# Allegro board FSCV_V1.brd
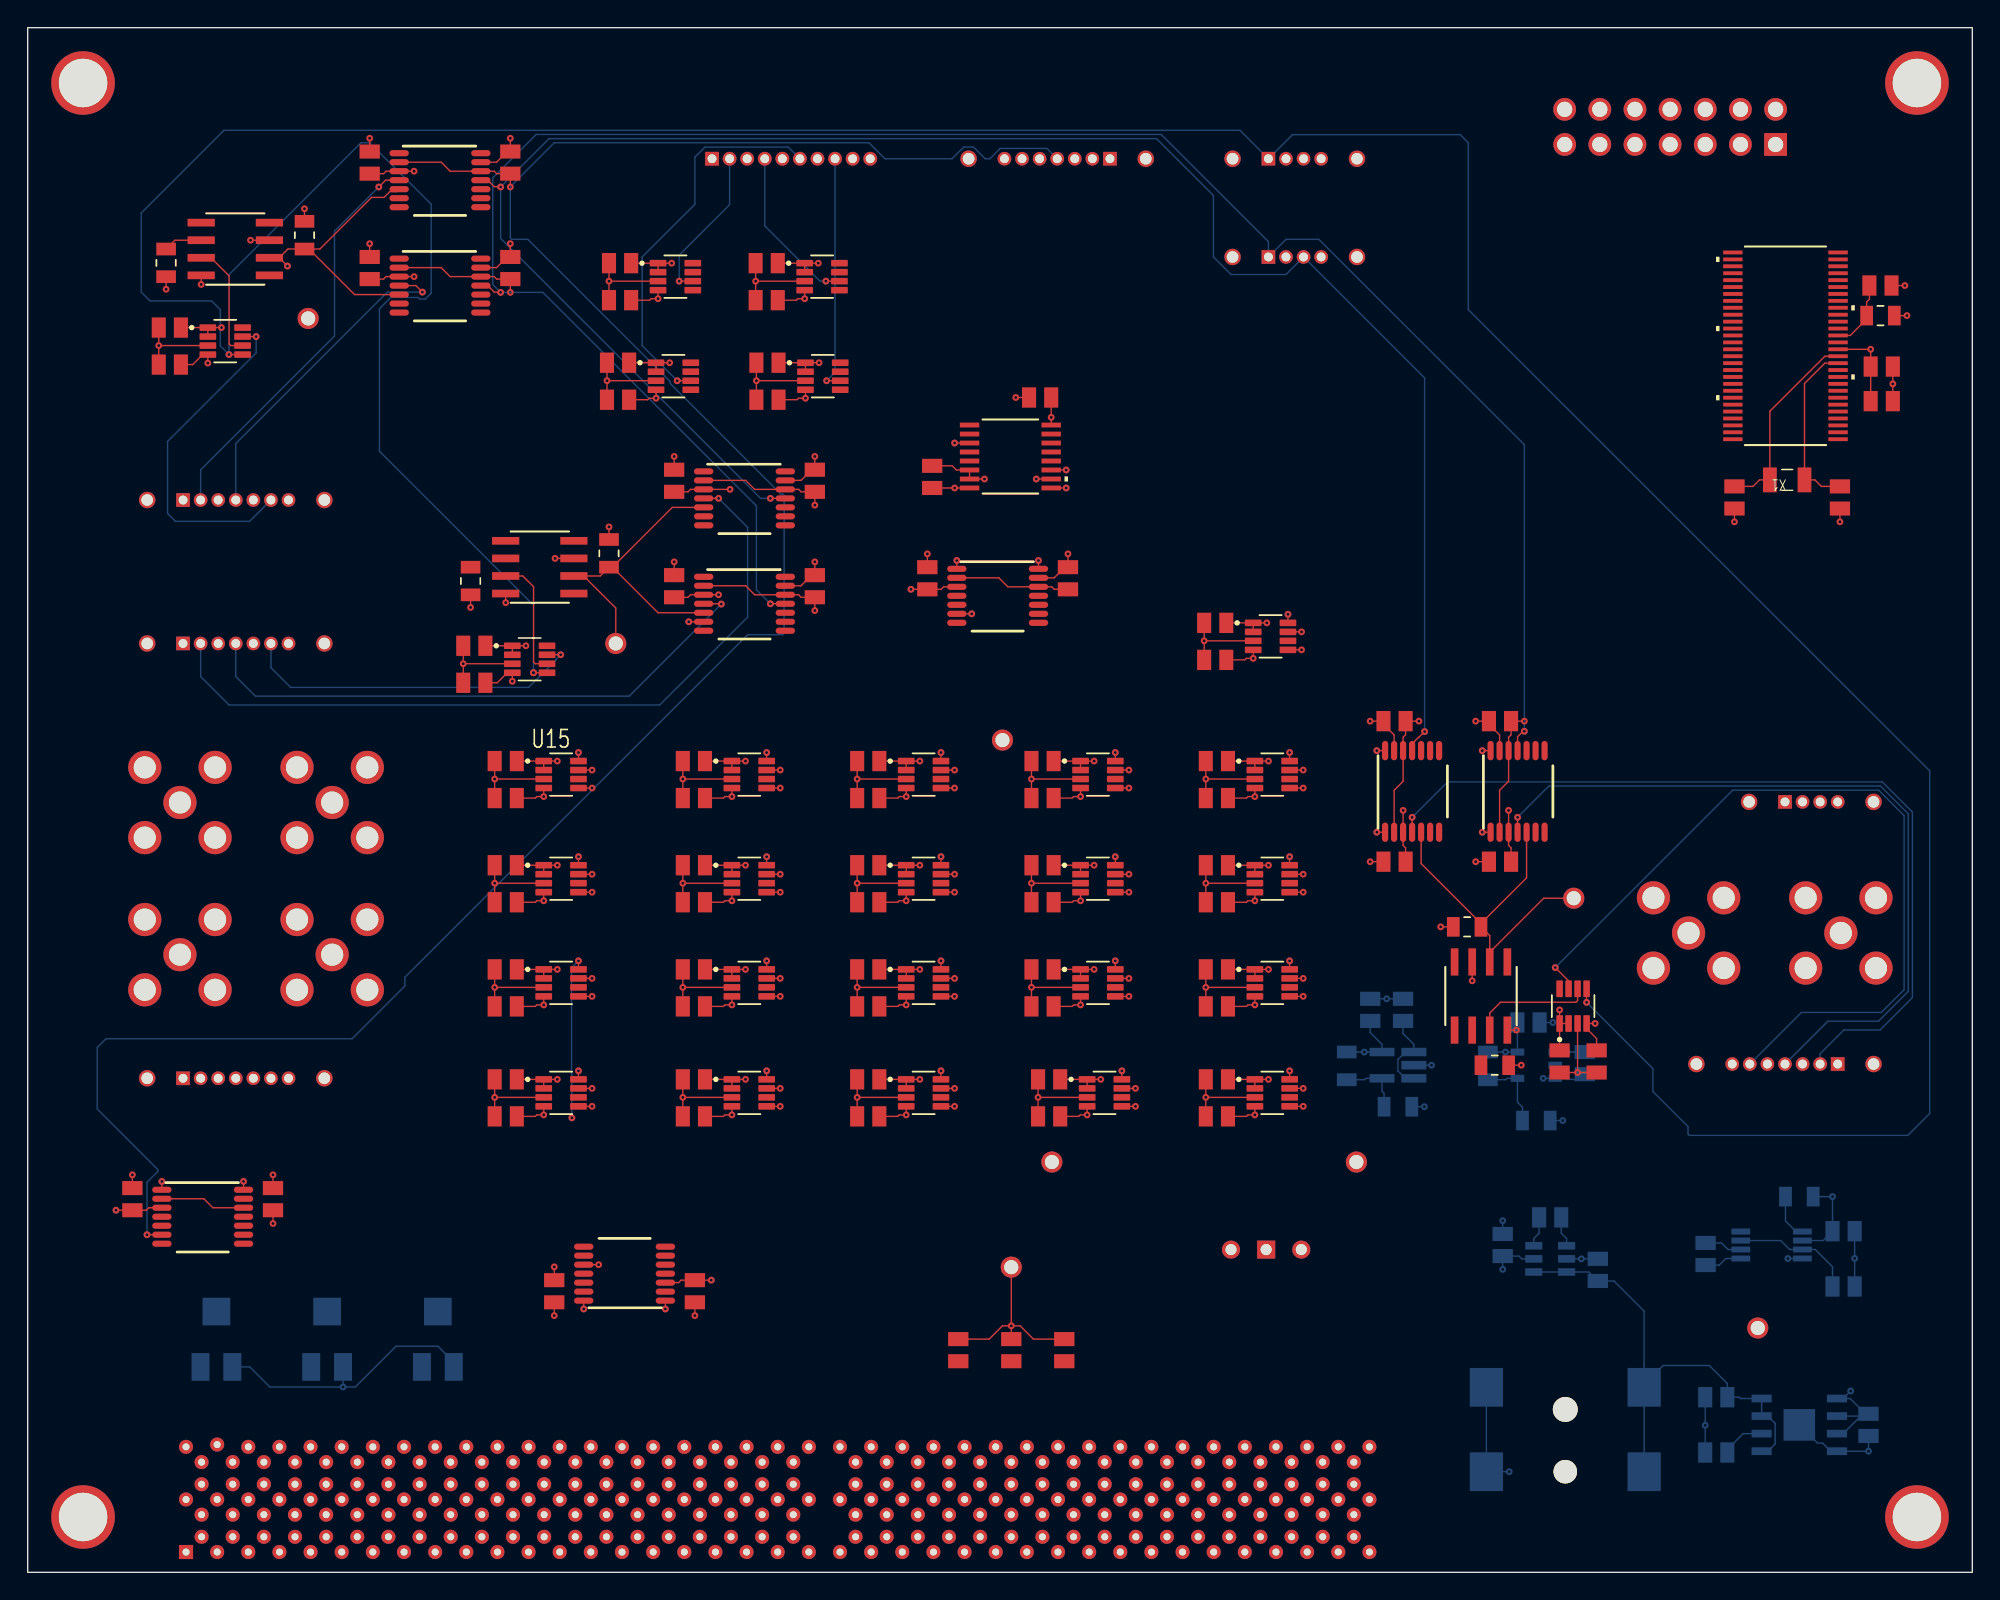
[diagram p0: board, top side]
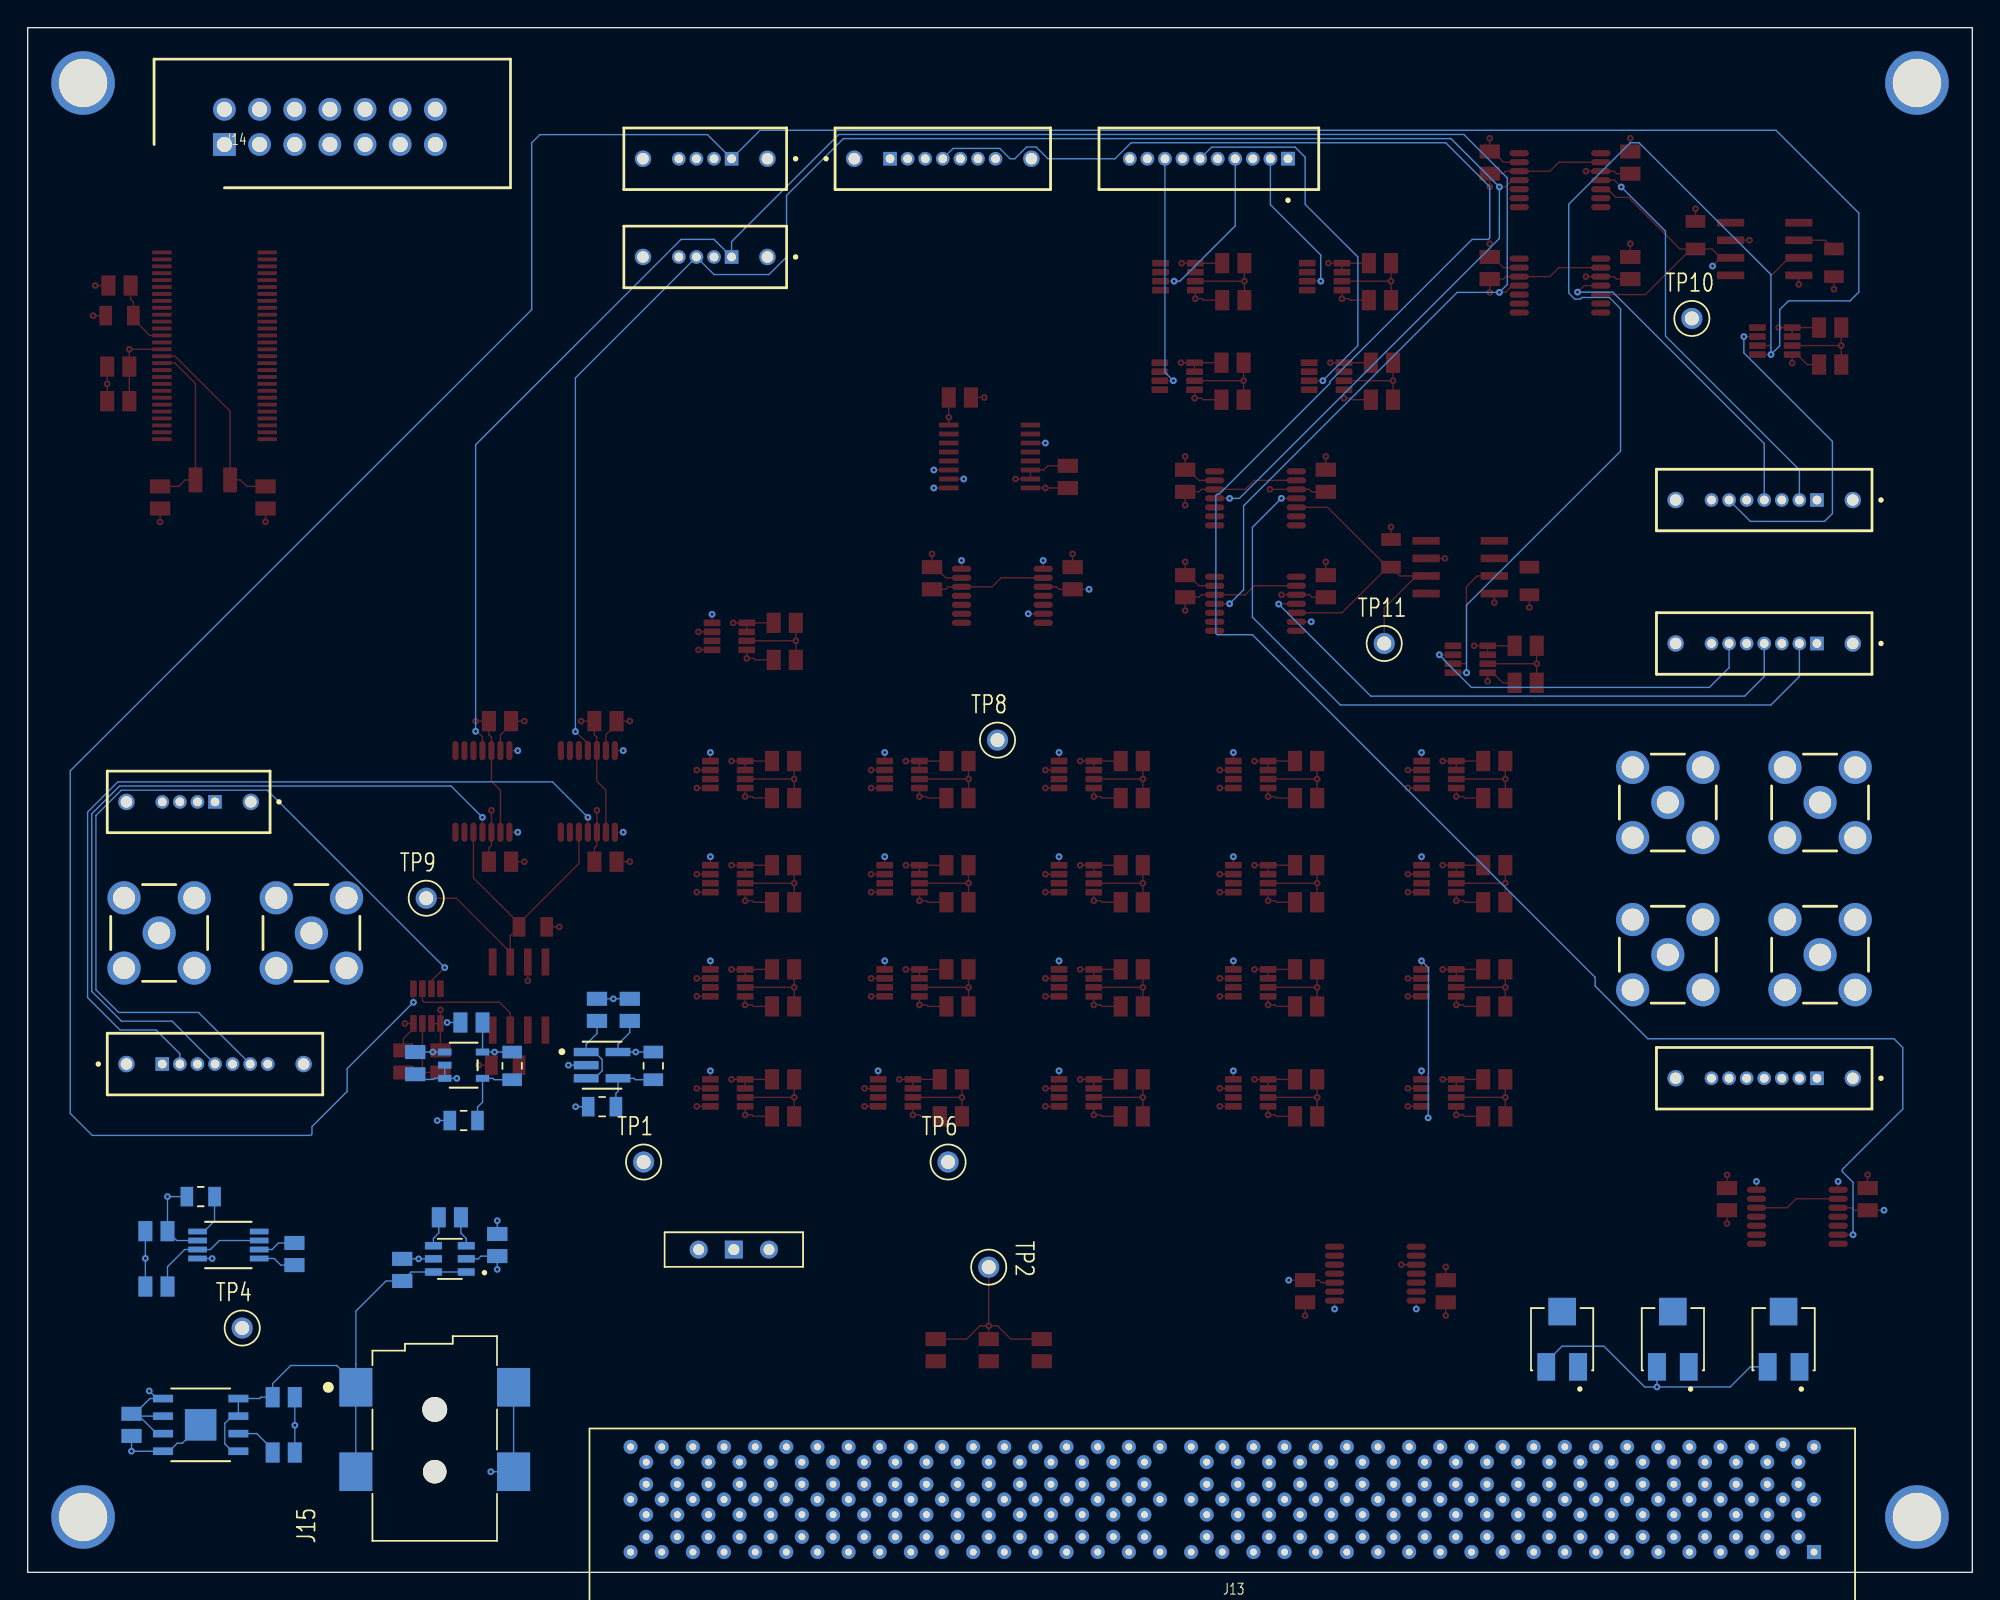
[diagram p1: board, bottom side, seen from below]

Outline 140.5 x 111.66 mm; copper layers: TOP, GND, TRACE, BOTTOM. Coordinates in mm from the lower left corner of the outline.
Outline path: rectangle 0,0 140.5,111.66

## Design rules (mm)
constraint set DEFAULT: min track width 0.127
net group ANALOG: nets SNFET_2_VD SNFET_4_VD SNFET_SHARED_VS TEST_EN_D
net group CONTROL: nets CH_EN_1_SEL CH_EN_2_SEL CH_EN_5_SEL CH_EN_D_SEL COND_EN_1_SEL COND_EN_2_SEL COND_EN_5_SEL COND_EN_D_SEL HP_BYPASS_EN_1_SEL HP_BYPASS_EN_2_SEL HP_BYPASS_EN_5_SEL HP_BYPASS_EN_D_SEL IREF_EN_12_SEL IREF_EN_56_SEL IREF_EN_D_SEL IREF_TEST_12_SEL IREF_TEST_56_SEL IREF_TEST_D_SEL SEL1_0 SEL1_1 SEL1_2 SEL4_0 SEL4_1 SEL5_0 SEL5_1 SEL6_0 SEL6_1 SEL7_0 SEL7_1 SEL8_0 SEL8_1 SEL9_0 SEL9_1 SEL10 SEL11 SEL12 SEL13 SEL14 SEL15 SEL16_0 SEL16_1
net group DIGITAL: nets CH_EN_1 CH_EN_2 CH_EN_5 CH_EN_D COND_EN_1 COND_EN_2 COND_EN_5 COND_EN_D HP_BYPASS_EN_1 HP_BYPASS_EN_2 HP_BYPASS_EN_5 HP_BYPASS_EN_D IREF_EN_12 IREF_EN_56 IREF_EN_D IREF_TEST_12 IREF_TEST_56 IREF_TEST_D VDD_12 VDD_56 VDD_D
net group MCU: nets RST TCK TDI TDO TEST TMS XIN XOUT
net group MISC: nets N162422
net group POWER: nets 3.3V +1.65V +5V -1.65V -5V
nets with their own width: min track width 0.1; nets 5V_UNREGULATED CM_EXT

## Placement (name value [footprint] x y rotation side)
C4  1.1n  [CAP0805]  133.87 93.02 180 top
C7  12p  [CAP0805]  130.94 77.7 270 top
C8  12p  [CAP0805]  123.31 77.7 270 top
C15  0.1u  [CAP0805]  73.32 58.65 180 top
C16  0.1u  [CAP0805]  73.32 55.97 0 top
C17  0.1u  [CAP0805]  73.32 51.12 180 top
C18  0.1u  [CAP0805]  73.32 48.44 0 top
C19  0.1u  [CAP0805]  73.32 43.59 180 top
C20  0.1u  [CAP0805]  73.32 40.91 0 top
C21  2.2u  [CAP0805]  122 12.66 180 bottom
C22  2.2u  [CAP0805]  133 10.66 270 bottom
C23  2.2u  [CAP0805]  122 8.66 180 bottom
C24  10u  [CAP0805]  131.2 20.66 0 bottom
C25  10u  [CAP0805]  131.2 24.66 0 bottom
C26  1u  [CAP0805]  121.23 23.01 270 bottom
C27  10u  [CAP0805]  113.44 21.86 90 bottom
C28  10u  [CAP0805]  106.57 23.66 90 bottom
C29  1u  [CAP0805]  110 25.66 0 bottom
C30  0.1u  [CAP0805]  60.73 58.65 180 top
C31  0.1u  [CAP0805]  60.73 55.97 0 top
C32  0.1u  [CAP0805]  60.73 51.12 180 top
C33  0.1u  [CAP0805]  60.73 48.44 0 top
C34  0.1u  [CAP0805]  60.73 43.59 180 top
C35  0.1u  [CAP0805]  60.73 40.91 0 top
C36  0.1u  [CAP0805]  60.73 35.63 180 top
C37  0.1u  [CAP0805]  60.73 32.96 0 top
C38  0.1u  [CAP0805]  48.13 58.65 180 top
C39  0.1u  [CAP0805]  48.13 55.97 0 top
C40  0.1u  [CAP0805]  48.13 51.12 180 top
C41  0.1u  [CAP0805]  48.13 48.44 0 top
C42  0.1u  [CAP0805]  48.13 43.59 180 top
C43  0.1u  [CAP0805]  48.13 40.91 0 top
C44  0.1u  [CAP0805]  48.13 35.63 180 top
C45  0.1u  [CAP0805]  48.13 32.96 0 top
C46  0.1u  [CAP0805]  34.54 58.65 180 top
C47  0.1u  [CAP0805]  34.54 55.97 0 top
C48  0.1u  [CAP0805]  34.54 51.12 180 top
C49  0.1u  [CAP0805]  34.54 48.44 0 top
C50  0.1u  [CAP0805]  34.54 43.59 180 top
C51  0.1u  [CAP0805]  34.54 40.91 0 top
C52  0.1u  [CAP0805]  34.54 35.63 180 top
C53  0.1u  [CAP0805]  34.54 32.96 0 top
C54  0.1u  [CAP0805]  85.92 58.65 180 top
C55  0.1u  [CAP0805]  85.92 55.97 0 top
C56  0.1u  [CAP0805]  85.92 51.12 180 top
C57  0.1u  [CAP0805]  85.92 48.44 0 top
C58  0.1u  [CAP0805]  85.92 43.59 180 top
C59  0.1u  [CAP0805]  85.92 40.91 0 top
C60  0.1u  [CAP0805]  73.8 35.63 180 top
C61  0.1u  [CAP0805]  73.8 32.96 0 top
C62  0.1u  [CAP0805]  85.92 35.63 180 top
C63  0.1u  [CAP0805]  85.92 32.96 0 top
C64  0.1u  [CAP0805]  85.8 68.63 180 top
C65  0.1u  [CAP0805]  85.8 65.96 0 top
C66  0.1u  [CAP0805]  110.68 36.93 270 top
C67  0.1u  [CAP0805]  113.36 36.93 90 top
C68  0.1u  [CAP0805]  98.75 51.37 180 top
C69  0.1u  [CAP0805]  98.75 61.53 0 top
C70  0.1u  [CAP0805]  106.38 61.53 0 top
C71  0.1u  [CAP0805]  106.38 51.37 180 top
C72  0.1u  [CAP0805]  34.87 101.91 270 top
C73  0.1u  [CAP0805]  24.71 101.91 90 top
C74  0.1u  [CAP0805]  34.87 94.28 270 top
C75  0.1u  [CAP0805]  10.27 89.98 180 top
C76  0.1u  [CAP0805]  10.27 87.31 0 top
C77  0.1u  [CAP0805]  24.71 94.28 90 top
C78  0.1u  [CAP0805]  56.87 78.91 270 top
C79  0.1u  [CAP0805]  46.71 78.91 90 top
C80  0.1u  [CAP0805]  56.87 71.28 270 top
C81  0.1u  [CAP0805]  32.27 66.98 180 top
C82  0.1u  [CAP0805]  32.27 64.31 0 top
C83  0.1u  [CAP0805]  46.71 71.28 90 top
C84  0.1u  [CAP0805]  17.72 26.97 270 top
C85  0.1u  [CAP0805]  7.56 26.97 90 top
C86  0.1u  [CAP0805]  75.16 71.86 270 top
C87  0.1u  [CAP0805]  65 71.86 90 top
C88  0.1u  [CAP0805]  73.15 84.92 0 top
C89  0.1u  [CAP0805]  65.35 79.19 270 top
C90  0.1u  [CAP0805]  42.8 94.63 180 top
C91  0.1u  [CAP0805]  42.8 91.96 0 top
C92  0.1u  [CAP0805]  53.4 94.63 180 top
C93  0.1u  [CAP0805]  53.4 91.96 0 top
C94  0.1u  [CAP0805]  42.66 87.44 180 top
C95  0.1u  [CAP0805]  42.66 84.76 0 top
C96  0.1u  [CAP0805]  53.45 87.44 180 top
C97  0.1u  [CAP0805]  53.45 84.76 0 top
C98  10u  [CAP0805]  99.37 40.66 90 bottom
C99  10u  [CAP0805]  97 40.66 90 bottom
C100  0.1u  [CAP0805]  38.04 20.32 90 top
C101  0.1u  [CAP0805]  48.21 20.32 270 top
C104  10u  [CAP0805]  133.96 87.16 0 top
C105  100n  [CAP0805]  133.96 84.66 0 top
C108  1u  [CAP0805]  108.43 39.75 0 bottom
C109  1u  [CAP0805]  112.5 36.81 90 bottom
J1  Connec-4  [SAMTEC_TFM-104-01-L-S-WT]  128.87 55.69 180 bottom
J5  Connec-7  [SAMTEC_TFM-107-01-S-S-WT]  126.96 36.74 0 bottom
J6  Connec-7  [SAMTEC_TFM-107-01-S-S-WT]  15.03 77.52 180 bottom
J7  Connec-7  [SAMTEC_TFM-107-01-S-S-WT]  15.03 67.15 180 bottom
J8  Connec-4  [SAMTEC_TFM-104-01-L-S-WT]  91.55 95.09 180 bottom
J9  Connec-4  [SAMTEC_TFM-104-01-L-S-WT]  91.55 102.19 180 bottom
J10  Connec-7  [SAMTEC_TFM-107-01-S-S-WT]  74.38 102.19 0 bottom
J11  Connec-10  [SAMTEC_TFM-110-01-X-S]  55.16 102.19 180 bottom
J12  Connec-7  [SAMTEC_TFM-107-01-S-S-WT]  15.03 35.72 180 bottom
J13  76291-0226  [762910226]  11.44 1.47 180 bottom
J14  JTAG  [SHDR14W64P254_2X7_2540X905X920P]  126.29 103.22 180 bottom
J15  PJ-002AH-SMT-TR  [CUI_PJ-002AH-SMT-TR]  110.79 10.38 90 bottom
J16  SMA-J-P-X-ST-TH1  [SAMTEC_SMA-J-P-X-ST-TH1]  131 46.22 180 bottom
J17  SMA-J-P-X-ST-TH1  [SAMTEC_SMA-J-P-X-ST-TH1]  11 55.65 180 bottom
J18  SMA-J-P-X-ST-TH1  [SAMTEC_SMA-J-P-X-ST-TH1]  120 46.22 180 bottom
J19  SMA-J-P-X-ST-TH1  [SAMTEC_SMA-J-P-X-ST-TH1]  22 55.65 180 bottom
J20  SMA-J-P-X-ST-TH1  [SAMTEC_SMA-J-P-X-ST-TH1]  11 44.65 180 bottom
J21  SMA-J-P-X-ST-TH1  [SAMTEC_SMA-J-P-X-ST-TH1]  22 44.65 180 bottom
NOREF  -  [unnamed]  136.5 107.66 0 top
NOREF#2  -  [unnamed]  136.5 4 0 top
NOREF#3  -  [unnamed]  4 107.66 0 top
NOREF#4  -  [unnamed]  4 4 0 top
R4  100k  [CAP0805]  74.89 16.06 90 top
R5  100k  [CAP0805]  67.24 16.06 90 top
R6  100k  [CAP0805]  71.06 16.06 90 top
R7  47k  [RES0805]  133.87 90.84 180 top
R9  100k  [RES0805]  128 27.16 0 bottom
R10  100k  [RES0805]  106 36.66 180 top
R11  100k  [RES0805]  104 46.66 0 top
R12  100k  [RES0805]  20 96.66 270 top
R13  100k  [RES0805]  10 94.66 90 top
R14  100k  [RES0805]  42 73.66 270 top
R15  100k  [RES0805]  32 71.66 90 top
R16  180k  [RES0805]  95.3 36.61 90 bottom
R17  480k  [RES0805]  99 33.66 180 bottom
R18  100k  [RES0805]  105.5 36.61 90 bottom
R19  32k  [RES0805]  109 32.66 180 bottom
SW1  MSS-102559-14A-D  [SW_MSS-102559-14A-D]  89.48 23.33 180 bottom
TP1  5000  [KEYSTONE_5000]  96 29.66 180 bottom
TP2  5000  [KEYSTONE_5000]  71.06 22.06 270 bottom
TP4  5000  [KEYSTONE_5000]  125 17.66 180 bottom
TP6  5000  [KEYSTONE_5000]  74 29.66 180 bottom
TP8  5000  [KEYSTONE_5000]  70.43 60.16 180 bottom
TP9  5000  [KEYSTONE_5000]  111.7 48.73 180 bottom
TP10  5000  [KEYSTONE_5000]  20.26 90.64 180 bottom
TP11  5000  [KEYSTONE_5000]  42.49 67.15 180 bottom
U2  TMUX6104PW  [PW0014A_N]  43.12 21.59 180 top
U3  ADP7118ARDZ-3.3  [RD-8-1_ADI]  128 10.66 180 bottom
U4  LTC1751  [MSOP-8_MS_LIT]  126 23.66 180 bottom
U5  LTC1983  [SOT95P280X100-6N]  110 22.66 0 bottom
U6  TPS784-Q1DBV  [DBV0005A_IPC_A]  99 36.66 180 bottom
U7  MAX1735  [21-0057F_MXM]  109 36.66 180 bottom
U8  TMUX4051-Q1_PWDYY  [TSSOP16_PW_TEX]  71 80.66 0 top
U9  TMUX6104PW  [PW0014A_N]  12.65 25.7 0 top
U10  TMUX6104PW  [PW0014A_N]  70.08 70.59 0 top
U11  TMUX6119DCNR  [SOT65P280X145-8N]  46.8 93.66 0 top
U12  TMUX6119DCNR  [SOT65P280X145-8N]  57.4 93.66 0 top
U13  TMUX6119DCNR  [SOT65P280X145-8N]  46.66 86.47 0 top
U14  TMUX6119DCNR  [SOT65P280X145-8N]  57.45 86.47 0 top
U15  TMUX6119DCNR  [SOT65P280X145-8N]  38.54 57.67 0 top
U16  TMUX6119DCNR  [SOT65P280X145-8N]  38.54 50.14 0 top
U17  TMUX6119DCNR  [SOT65P280X145-8N]  38.54 42.61 0 top
U18  TMUX6119DCNR  [SOT65P280X145-8N]  38.54 34.66 0 top
U19  TMUX6119DCNR  [SOT65P280X145-8N]  52.13 57.67 0 top
U20  TMUX6119DCNR  [SOT65P280X145-8N]  52.13 50.14 0 top
U21  TMUX6119DCNR  [SOT65P280X145-8N]  52.13 42.61 0 top
U22  TMUX6119DCNR  [SOT65P280X145-8N]  52.13 34.66 0 top
U23  TMUX6119DCNR  [SOT65P280X145-8N]  64.73 57.67 0 top
U24  TMUX6119DCNR  [SOT65P280X145-8N]  64.73 50.14 0 top
U25  TMUX6119DCNR  [SOT65P280X145-8N]  64.73 42.61 0 top
U26  TMUX6119DCNR  [SOT65P280X145-8N]  64.73 34.66 0 top
U27  TMUX6119DCNR  [SOT65P280X145-8N]  77.32 57.67 0 top
U28  TMUX6119DCNR  [SOT65P280X145-8N]  77.32 50.14 0 top
U29  TMUX6119DCNR  [SOT65P280X145-8N]  77.32 42.61 0 top
U30  TMUX6119DCNR  [SOT65P280X145-8N]  89.92 57.67 0 top
U31  TMUX6119DCNR  [SOT65P280X145-8N]  89.92 50.14 0 top
U32  TMUX6119DCNR  [SOT65P280X145-8N]  89.92 42.61 0 top
U33  TMUX6119DCNR  [SOT65P280X145-8N]  77.8 34.66 0 top
U34  TMUX6119DCNR  [SOT65P280X145-8N]  89.92 34.66 0 top
U35  TMUX6119DCNR  [SOT65P280X145-8N]  89.8 67.66 0 top
U36  ADA4610-1  [R_8_ADI]  105 41.66 90 top
U37  TMUX6119DCNR  [SOT65P280X145-8N]  111.65 40.93 90 top
U38  TMUX6104PW  [PW0014A_N]  100.02 56.45 90 top
U39  TMUX6104PW  [PW0014A_N]  107.64 56.45 90 top
U40  ADA4610-1  [R_8_ADI]  15 95.66 0 top
U41  TMUX6119DCNR  [SOT65P280X145-8N]  14.27 89 0 top
U42  TMUX6104PW  [PW0014A_N]  29.79 100.63 0 top
U43  TMUX6104PW  [PW0014A_N]  29.79 93.01 0 top
U44  ADA4610-1  [R_8_ADI]  37 72.66 0 top
U45  TMUX6119DCNR  [SOT65P280X145-8N]  36.27 66 0 top
U46  TMUX6104PW  [PW0014A_N]  51.79 77.63 0 top
U47  TMUX6104PW  [PW0014A_N]  51.79 70.01 0 top
U48  MSP430FR4132IG56  [DGG56_TEX]  127 88.66 180 top
VR3  3314J-1-754E  [TRIM_3314J-1-754E]  13.63 16.85 180 bottom
VR4  3314J-1-754E  [TRIM_3314J-1-754E]  21.63 16.85 180 bottom
VR5  3314J-1-754E  [TRIM_3314J-1-754E]  29.63 16.85 180 bottom
X1  Crystal  [FC135R327680KAA3]  127.12 78.97 180 top

## Library data of the parts
C4 C7 C8 C15-C101 C104 C105 C108 C109 = C
J1 J8 J9 = Connec-4
J5-J7 J10 J12 = Connec-7
J11 = Connec-10
J13 = Edge_conn_76291-0226
J14 = JTAG_87831-1420
J15 = Power_Jack_PJ-002AH-SMT-TR
J16-J21 = SMA-J-P-X-ST-TH1
R4-R7 R9-R19 = R
SW1 = Switch_1P2T_MSS-102559-14A-D
TP1 TP2 TP4 TP6 TP8-TP11 = TP
U2 U9 U10 U38 U39 U42 U43 U46 U47 = TMUX6104PWR
U3 = Volt_Reg_ADP7118ARDZ-3.3: User Part Number: PN
U4 = LTC1751EMS8-5
U5 = LTC1983ES6-5
U6 = TPS78401QDBVRQ1
U7 = MAX1735EUK25T
U8 = TMUX4051PWRQ1
U11-U35 U37 U41 U45 = TMUX6119DCNR
U36 U40 U44 = ADA4610-1ARJZ-R2
U48 = MSP430FR4132IG56
VR3-VR5 = 3314J-1-754E
X1 = Crystal

## Footprints (pads in the part's own frame, mm; a bottom-side part is the same pattern mirrored in y, then rotated)
21-0057F_MXM
  rect 0.978x0.508 smd: 1(-1.365,0.95) 2(-1.365,0) 3(-1.365,-0.95) 4(1.365,-0.95) 5(1.365,0.95)
762910226
  round 0 hole 2.08 unplated: (-87.2,1.9) (1.7,5.32)
  rect 1.02x1.02 hole 0.51: 1(0,0)
  round 1.02 hole 0.51: 2(-1.125,1.1) 3(-1.125,2.7) 4(-2.25,0) 5(-3.375,1.1) 6(-3.375,2.7) 7(-4.5,0) 8(-5.625,1.1) 9(-5.625,2.7) 10(-6.75,0) 11(-7.875,1.1) 12(-7.875,2.7) 13(-9,0) 14(-10.125,1.1) 15(-10.125,2.7) 16(-11.25,0) 17(-12.375,1.1) 18(-12.375,2.7) 19(-13.5,0) 20(-14.625,1.1) 21(-14.625,2.7) 22(-15.75,0) 23(-16.875,1.1) 24(-16.875,2.7) 25(-18,0) 26(-19.125,1.1) 27(-19.125,2.7) 28(-20.25,0) 29(-21.375,1.1) 30(-21.375,2.7) 31(-22.5,0) 32(-23.625,1.1) 33(-23.625,2.7) 34(-24.75,0) 35(-25.875,1.1) 36(-25.875,2.7) 37(-27,0) 38(-28.125,1.1) 39(-28.125,2.7) 40(-29.25,0) 41(-30.375,1.1) 42(-30.375,2.7) 43(-31.5,0) 44(-32.625,1.1) 45(-32.625,2.7) 46(-33.75,0) 47(-34.875,1.1) 48(-34.875,2.7) 49(-36,0) 50(-37.125,1.1) 51(-37.125,2.7) 52(-38.25,0) 53(-39.375,1.1) 54(-39.375,2.7) 55(-40.5,0) 56(-41.625,1.1) 57(-41.625,2.7) 58(-42.75,0) 59(-43.875,1.1) 60(-43.875,2.7) 61(-45,0) 62(-47.25,0) 63(-48.375,1.1) 64(-48.375,2.7) 65(-49.5,0) 66(-50.625,1.1) 67(-50.625,2.7) 68(-51.75,0) 69(-52.875,1.1) 70(-52.875,2.7) 71(-54,0) 72(-55.125,1.1) 73(-55.125,2.7) 74(-56.25,0) 75(-57.375,1.1) 76(-57.375,2.7) 77(-58.5,0) 78(-59.625,1.1) 79(-59.625,2.7) 80(-60.75,0) 81(-61.875,1.1) 82(-61.875,2.7) 83(-63,0) 84(-64.125,1.1) 85(-64.125,2.7) 86(-65.25,0) 87(-66.375,1.1) 88(-66.375,2.7) 89(-67.5,0) 90(-68.625,1.1) 91(-68.625,2.7) 92(-69.75,0) 93(-70.875,1.1) 94(-70.875,2.7) 95(-72,0) 96(-73.125,1.1) 97(-73.125,2.7) 98(-74.25,0) 99(-75.375,1.1) 100(-75.375,2.7) 101(-76.5,0) 102(-77.625,1.1) 103(-77.625,2.7) 104(-78.75,0) 105(-79.875,1.1) 106(-79.875,2.7) 107(-81,0) 108(-82.125,1.1) 109(-82.125,2.7) 110(-83.25,0) 111(-84.375,1.1) 112(-84.375,2.7) 113(-85.5,0) 114(-85.5,7.6) 115(-84.375,6.5) 116(-84.375,4.9) 117(-83.25,7.6) 118(-82.125,6.5) 119(-82.125,4.9) 120(-81,7.6) 121(-79.875,6.5) 122(-79.875,4.9) 123(-78.75,7.6) 124(-77.625,6.5) 125(-77.625,4.9) 126(-76.5,7.6) 127(-75.375,6.5) 128(-75.375,4.9) 129(-74.25,7.6) 130(-73.125,6.5) 131(-73.125,4.9) 132(-72,7.6) 133(-70.875,6.5) 134(-70.875,4.9) 135(-69.75,7.6) 136(-68.625,6.5) 137(-68.625,4.9) 138(-67.5,7.6) 139(-66.375,6.5) 140(-66.375,4.9) 141(-65.25,7.6) 142(-64.125,6.5) 143(-64.125,4.9) 144(-63,7.6) 145(-61.875,6.5) 146(-61.875,4.9) 147(-60.75,7.6) 148(-59.625,6.5) 149(-59.625,4.9) 150(-58.5,7.6) 151(-57.375,6.5) 152(-57.375,4.9) 153(-56.25,7.6) 154(-55.125,6.5) 155(-55.125,4.9) 156(-54,7.6) 157(-52.875,6.5) 158(-52.875,4.9) 159(-51.75,7.6) 160(-50.625,6.5) 161(-50.625,4.9) 162(-49.5,7.6) 163(-48.375,6.5) 164(-48.375,4.9) 165(-47.25,7.6) 166(-45,7.6) 167(-43.875,6.5) 168(-43.875,4.9) 169(-42.75,7.6) 170(-41.625,6.5) 171(-41.625,4.9) 172(-40.5,7.6) 173(-39.375,6.5) 174(-39.375,4.9) 175(-38.25,7.6) 176(-37.125,6.5) 177(-37.125,4.9) 178(-36,7.6) 179(-34.875,6.5) 180(-34.875,4.9) 181(-33.75,7.6) 182(-32.625,6.5) 183(-32.625,4.9) 184(-31.5,7.6) 185(-30.375,6.5) 186(-30.375,4.9) 187(-29.25,7.6) 188(-28.125,6.5) 189(-28.125,4.9) 190(-27,7.6) 191(-25.875,6.5) 192(-25.875,4.9) 193(-24.75,7.6) 194(-23.625,6.5) 195(-23.625,4.9) 196(-22.5,7.6) 197(-21.375,6.5) 198(-21.375,4.9) 199(-20.25,7.6) 200(-19.125,6.5) 201(-19.125,4.9) 202(-18,7.6) 203(-16.875,6.5) 204(-16.875,4.9) 205(-15.75,7.6) 206(-14.625,6.5) 207(-14.625,4.9) 208(-13.5,7.6) 209(-12.375,6.5) 210(-12.375,4.9) 211(-11.25,7.6) 212(-10.125,6.5) 213(-10.125,4.9) 214(-9,7.6) 215(-7.875,6.5) 216(-7.875,4.9) 217(-6.75,7.6) 218(-5.625,6.5) 219(-5.625,4.9) 220(-4.5,7.6) 221(-3.375,6.5) 222(-3.375,4.9) 223(-2.25,7.77) 224(-1.125,6.5) 225(-1.125,4.9) 226(0,7.6) A1(0,3.8) A2(-2.25,3.8) A3(-4.5,3.8) A4(-6.75,3.8) A5(-9,3.8) A6(-11.25,3.8) A7(-13.5,3.8) A8(-15.75,3.8) A9(-18,3.8) A10(-20.25,3.8) A11(-22.5,3.8) A12(-24.75,3.8) A13(-27,3.8) A14(-29.25,3.8) A15(-31.5,3.8) A16(-33.75,3.8) A17(-36,3.8) A18(-38.25,3.8) A19(-40.5,3.8) A20(-42.75,3.8) A21(-45,3.8) A22(-47.25,3.8) A23(-49.5,3.8) A24(-51.75,3.8) A25(-54,3.8) A26(-56.25,3.8) A27(-58.5,3.8) A28(-60.75,3.8) A29(-63,3.8) A30(-65.25,3.8) A31(-67.5,3.8) A32(-69.75,3.8) A33(-72,3.8) A34(-74.25,3.8) A35(-76.5,3.8) A36(-78.75,3.8) A37(-81,3.8) A38(-83.25,3.8) A39(-85.5,3.8)
CAP0805
  rect 1.02x1.47 smd: 1(-0.8,0) 2(0.8,0)
CUI_PJ-002AH-SMT-TR
  round 1.7 hole 1.7 unplated: (-3.1,0.3)
  round 1.8 hole 1.8 unplated: (1.4,0.3)
  rect 2.8x2.4 smd: 1A(3,6) 1B(-3.1,6) 2(-3.1,-5.4) 3(3,-5.4)
DBV0005A_IPC_A
  rect 1.805x0.612 smd: 1(-1.151,0.95) 2(-1.151,0) 3(-1.151,-0.95) 4(1.151,-0.95) 5(1.151,0.95)
DGG56_TEX
  rect 1.404x0.279 smd: 1(-3.801,6.75) 2(-3.801,6.25) 3(-3.801,5.75) 4(-3.801,5.25) 5(-3.801,4.75) 6(-3.801,4.25) 7(-3.801,3.75) 8(-3.801,3.25) 9(-3.801,2.75) 10(-3.801,2.25) 11(-3.801,1.75) 12(-3.801,1.25) 13(-3.801,0.75) 14(-3.801,0.25) 15(-3.801,-0.25) 16(-3.801,-0.75) 17(-3.801,-1.25) 18(-3.801,-1.75) 19(-3.801,-2.25) 20(-3.801,-2.75) 21(-3.801,-3.25) 22(-3.801,-3.75) 23(-3.801,-4.25) 24(-3.801,-4.75) 25(-3.801,-5.25) 26(-3.801,-5.75) 27(-3.801,-6.25) 28(-3.801,-6.75) 29(3.801,-6.75) 30(3.801,-6.25) 31(3.801,-5.75) 32(3.801,-5.25) 33(3.801,-4.75) 34(3.801,-4.25) 35(3.801,-3.75) 36(3.801,-3.25) 37(3.801,-2.75) 38(3.801,-2.25) 39(3.801,-1.75) 40(3.801,-1.25) 41(3.801,-0.75) 42(3.801,-0.25) 43(3.801,0.25) 44(3.801,0.75) 45(3.801,1.25) 46(3.801,1.75) 47(3.801,2.25) 48(3.801,2.75) 49(3.801,3.25) 50(3.801,3.75) 51(3.801,4.25) 52(3.801,4.75) 53(3.801,5.25) 54(3.801,5.75) 55(3.801,6.25) 56(3.801,6.75)
FC135R327680KAA3
  rect 1x1.8 smd: 1(-1.25,0) 2(1.25,0)
KEYSTONE_5000
  round 1.53 hole 1.02: TP(0,0)
MSOP-8_MS_LIT
  rect 1.353x0.431 smd: 1(-2.226,0.975) 2(-2.226,0.325) 3(-2.226,-0.325) 4(-2.226,-0.975) 5(2.226,-0.975) 6(2.226,-0.325) 7(2.226,0.325) 8(2.226,0.975)
PW0014A_N
  oval 1.4x0.45 smd: 1(-2.95,1.95) 2(-2.95,1.3) 3(-2.95,0.65) 4(-2.95,0) 5(-2.95,-0.65) 6(-2.95,-1.3) 7(-2.95,-1.95) 8(2.95,-1.95) 9(2.95,-1.3) 10(2.95,-0.65) 11(2.95,0) 12(2.95,0.65) 13(2.95,1.3) 14(2.95,1.95)
R_8_ADI
  rect 1.97x0.558 smd: 1(-2.464,1.905) 2(-2.464,0.635) 3(-2.464,-0.635) 4(-2.464,-1.905) 5(2.464,-1.905) 6(2.464,-0.635) 7(2.464,0.635) 8(2.464,1.905)
RD-8-1_ADI
  rect 1.455x0.558 smd: 1(-2.721,1.905) 2(-2.721,0.635) 3(-2.721,-0.635) 4(-2.721,-1.905) 5(2.721,-1.905) 6(2.721,-0.635) 7(2.721,0.635) 8(2.721,1.905)
  rect 2.286x2.286 smd: 9(0,0)
RES0805
  rect 0.92x1.42 smd: 1(-1,0) 2(1,0)
SAMTEC_SMA-J-P-X-ST-TH1
  round 2.4 hole 1.6: 1(0,0) 2(2.54,-2.54) 3(2.54,2.54) 4(-2.54,2.54) 5(-2.54,-2.54)
SAMTEC_TFM-104-01-L-S-WT
  rect 0.99x0.99 hole 0.64: 01(1.905,0)
  round 0.99 hole 0.64: 02(0.635,0) 03(-0.635,0) 04(-1.905,0)
  round 1.19 hole 0.84: S1(-4.495,0) S2(4.495,0)
SAMTEC_TFM-107-01-S-S-WT
  rect 0.99x0.99 hole 0.64: 01(3.81,0)
  round 0.99 hole 0.64: 02(2.54,0) 03(1.27,0) 04(0,0) 05(-1.27,0) 06(-2.54,0) 07(-3.81,0)
  round 1.19 hole 0.84: S1(-6.4,0) S2(6.4,0)
SAMTEC_TFM-110-01-X-S
  rect 1x1 hole 0.64: 01(5.715,0)
  round 1 hole 0.64: 02(4.445,0) 03(3.175,0) 04(1.905,0) 05(0.635,0) 06(-0.635,0) 07(-1.905,0) 08(-3.175,0) 09(-4.445,0) 10(-5.715,0)
SHDR14W64P254_2X7_2540X905X920P
  rect 1.65x1.65 hole 1.1: 1(0,0)
  round 1.65 hole 1.1: 2(0,2.54) 3(2.54,0) 4(2.54,2.54) 5(5.08,0) 6(5.08,2.54) 7(7.62,0) 8(7.62,2.54) 9(10.16,0) 10(10.16,2.54) 11(12.7,0) 12(12.7,2.54) 13(15.24,0) 14(15.24,2.54)
SOT65P280X145-8N
  custom 1.21x0.48 smd: 1(-1.255,0.975) 2(-1.255,0.325) 3(-1.255,-0.325) 4(-1.255,-0.975) 5(1.255,-0.975) 6(1.255,-0.325) 7(1.255,0.325) 8(1.255,0.975)
SOT95P280X100-6N
  custom 1.24x0.55 smd: 1(-1.185,0.95) 2(-1.185,0) 3(-1.185,-0.95) 4(1.185,-0.95) 5(1.185,0) 6(1.185,0.95)
SW_MSS-102559-14A-D
  rect 1.308x1.308 hole 0.8: 1(0,0)
  round 1.308 hole 0.8: 2(-2.54,0) 3(2.54,0)
TRIM_3314J-1-754E
  rect 1.3x2 smd: 1(1.15,-2) 3(-1.15,-2)
  rect 2x2 smd: 2(0,2)
TSSOP16_PW_TEX
  rect 1.404x0.355 smd: 1(-2.95,2.275) 2(-2.95,1.625) 3(-2.95,0.975) 4(-2.95,0.325) 5(-2.95,-0.325) 6(-2.95,-0.975) 7(-2.95,-1.625) 8(-2.95,-2.275) 9(2.95,-2.275) 10(2.95,-1.625) 11(2.95,-0.975) 12(2.95,-0.325) 13(2.95,0.325) 14(2.95,0.975) 15(2.95,1.625) 16(2.95,2.275)
unnamed
  round 4.6 hole 3.5: (0,0)

## Nets
3.3V: C22.1 C104.2 C105.2 J14.4 R7.1 U3.1 U3.2(VOUT_2) U3.3 U48.15
5V_UNREGULATED: C21.1 C24.1 C27.1 C98.1 J15.1A J15.1B U3.5 U3.7 U3.8 U4.3 U4.7 U5.1 U5.6 U6.1 U6.3
+1.65V: C99.1 R16.2 TP1.TP U2.10 U6.5(OUT) U15.5 U16.5 U17.5 U18.5 U19.5 U20.5 U21.5 U22.5 U23.5 U24.5 U25.5 U26.5 U27.5 U28.5 U29.5 U30.5 U31.5 U32.5 U33.5 U34.5 U35.5
+5V: C15.1 C17.1 C19.1 C25.1 C30.1 C32.1 C34.1 C36.1 C38.1 C40.1 C42.1 C44.1 C46.1 C48.1 C50.1 C52.1 C54.1 C56.1 C58.1 C60.1 C62.1 C64.1 C66.1 C69.2 C70.2 C72.2 C74.2 C75.1 C78.2 C80.2 C81.1 C84.2 C86.2 C88.2 C90.1 C92.1 C94.1 C96.1 C100.2 R9.2 TP4.TP U2.2 U2.12 U4.2(VOUT) U8.16 U9.2 U9.12 U10.2 U10.12 U11.1 U11.2 U12.1 U12.2 U13.1 U13.2 U14.1 U14.2 U15.1 U15.2 U16.1 U16.2 U17.1 U17.2 U18.1 U18.2 U19.1 U19.2 U20.1 U20.2 U21.1 U21.2 U22.1 U22.2 U23.1 U23.2 U24.1 U24.2 U25.1 U25.2 U26.1 U26.2 U27.1 U27.2 U28.1 U28.2 U29.1 U29.2 U30.1 U30.2 U31.1 U31.2 U32.1 U32.2 U33.1 U33.2 U34.1 U34.2 U35.1 U35.2 U36.7 U37.1 U37.2 U38.2 U38.12 U39.2 U39.12 U40.7 U41.1 U41.2 U42.2 U42.12 U43.2 U43.12 U44.7 U45.1 U45.2 U46.2 U46.12 U47.2 U47.12
-1.65V: C108.1 J13.9 J13.25 J13.64 J13.97 J13.125 J13.143 J13.162 J13.218(VSS_7) R4.2 R5.2 R6.2 R18.2 TP2.TP TP6.TP U7.5 U15.7 U16.7 U17.7 U18.7 U19.7 U20.7 U21.7 U22.7 U23.7 U24.7 U25.7 U26.7 U27.7 U28.7 U29.7 U30.7 U31.7 U32.7 U33.7 U34.7 U35.7 VR3.3 VR4.3 VR5.3
-5V: C16.2 C18.2 C20.2 C28.1 C31.2 C33.2 C35.2 C37.2 C39.2 C41.2 C43.2 C45.2 C47.2 C49.2 C51.2 C53.2 C55.2 C57.2 C59.2 C61.2 C63.2 C65.2 C67.2 C68.1 C71.1 C73.1 C76.2 C77.1 C79.1 C82.2 C83.1 C85.1 C87.1 C89.1 C91.2 C93.2 C95.2 C97.2 C101.1 C109.1 U2.3(VSS) U5.2(VOUT) U7.2 U7.3 U8.6 U8.7(VSS) U9.3(VSS) U10.3(VSS) U11.4(VSS) U12.4(VSS) U13.4(VSS) U14.4(VSS) U15.4(VSS) U16.4(VSS) U17.4(VSS) U18.4(VSS) U19.4(VSS) U20.4(VSS) U21.4(VSS) U22.4(VSS) U23.4(VSS) U24.4(VSS) U25.4(VSS) U26.4(VSS) U27.4(VSS) U28.4(VSS) U29.4(VSS) U30.4(VSS) U31.4(VSS) U32.4(VSS) U33.4(VSS) U34.4(VSS) U35.4(VSS) U36.4(V-) U37.4(VSS) U38.3(VSS) U39.3(VSS) U40.4(V-) U41.4(VSS) U42.3(VSS) U43.3(VSS) U44.4(V-) U45.4(VSS) U46.3(VSS) U47.3(VSS)
GND: C4.1 C7.2 C8.2 C15.2 C16.1 C17.2 C18.1 C19.2 C20.1 C21.2 C22.2 C23.2 C24.2 C25.2 C27.2 C28.2 C30.2 C31.1 C32.2 C33.1 C34.2 C35.1 C36.2 C37.1 C38.2 C39.1 C40.2 C41.1 C42.2 C43.1 C44.2 C45.1 C46.2 C47.1 C48.2 C49.1 C50.2 C51.1 C52.2 C53.1 C54.2 C55.1 C56.2 C57.1 C58.2 C59.1 C60.2 C61.1 C62.2 C63.1 C64.2 C65.1 C66.2 C67.1 C68.2 C69.1 C70.1 C71.2 C72.1 C73.2 C74.1 C75.2 C76.1 C77.2 C78.1 C79.2 C80.1 C81.2 C82.1 C83.2 C84.1 C85.2 C86.1 C87.2 C88.1 C89.2 C90.2 C91.1 C92.2 C93.1 C94.2 C95.1 C96.2 C97.1 C98.2 C99.2 C100.1 C101.2 C104.1 C105.1 C108.2 C109.2 J1.02 J1.04 J5.01 J5.03 J5.05 J5.07 J6.01 J6.03 J6.05 J6.07 J7.01 J7.03 J7.05 J7.07 J8.02 J8.04 J9.02 J9.04 J10.01 J10.03 J10.05 J10.07 J11.01 J11.03 J11.05 J11.07 J11.09(9) J11.10 J12.01 J12.03 J12.05 J12.07 J14.9 J15.2 J15.3 J16.2 J16.3 J16.4 J16.5 J17.2 J17.3 J17.4 J17.5 J18.2 J18.3 J18.4 J18.5 J19.2 J19.3 J19.4 J19.5 J20.2 J20.3 J20.4 J20.5 J21.2 J21.3 J21.4 J21.5 R10.1 R11.1 R12.1 R13.1 R14.1 R15.1 R17.1 R19.1 SW1.2 U2.13 U3.4 U3.9 U4.4 U5.5 U6.2 U7.1 U8.8 U9.13 U10.13 U11.3 U12.3 U13.3 U14.3 U15.3 U16.3 U17.3 U18.3 U19.3 U20.3 U21.3 U22.3 U23.3 U24.3 U25.3 U26.3 U27.3 U28.3 U29.3 U30.3 U31.3 U32.3 U33.3 U34.3 U35.3 U37.3 U38.13 U39.13 U41.3 U42.13 U43.13 U45.3 U46.13 U47.13 U48.14
VDD_12: J13.126 U27.6
VDD_56: J13.108 U28.6
VDD_D: J13.80 U29.6
BOTTOM_PLANE: J13.144 U2.6
CH_EN_1: J13.123 TP8.TP U23.6
CH_EN_1_SEL: U23.8 U48.53
CH_EN_2: J13.114 U24.6
CH_EN_2_SEL: U24.8 U48.54
CH_EN_5: J13.165 U25.6
CH_EN_5_SEL: U25.8 U48.55
CH_EN_D: J13.83 U26.6
CH_EN_D_SEL: U26.8 U48.56
CH_OUTPUT_1: J1.01 J13.124
CH_OUTPUT_2: J13.2 J18.1
CH_OUTPUT_5: J13.164 J19.1
CH_OUTPUT_D: J13.71 J21.1
CM: J13.84 J13.127 J13.161 SW1.1
CM_EXT: J9.03 SW1.3
COND_EN_1: J13.119 U19.6
COND_EN_1_SEL: U19.8 U48.49
COND_EN_2: J13.116 U20.6
COND_EN_2_SEL: U20.8 U48.50
COND_EN_5: J13.110 U21.6
COND_EN_5_SEL: U21.8 U48.51
COND_EN_D: J13.76 U22.6
COND_EN_D_SEL: U22.8 U48.52
DIFF_NFET_1_SHARED_VB: J13.152 U12.7
DIFF_NFET_1_SHARED_VD: J13.149 U14.7
DIFF_NFET_1_VSN: J13.150 U13.7
DIFF_NFET_1_VSP: J13.151 U11.7
DIFF_NFET_2_SHARED_VB: J13.153 U12.5
DIFF_NFET_2_SHARED_VD: J13.148 U14.5
DIFF_NFET_2_VSN: J13.66 U13.5
DIFF_NFET_2_VSP: J13.67 U11.5
HP_BYPASS_EN_1: J13.122 U15.6
HP_BYPASS_EN_1_SEL: U15.8 U48.48
HP_BYPASS_EN_2: U2.4 U16.6
HP_BYPASS_EN_2_SEL: U16.8 U48.47
HP_BYPASS_EN_5: J13.113 U17.6
HP_BYPASS_EN_5_SEL: U17.8 U48.46
HP_BYPASS_EN_D: U2.5 U18.6
HP_BYPASS_EN_D_SEL: U18.8 U48.45
HPF_OUT_BUF: J12.02 J13.72
IREF_EN_12: J13.128 U33.6
IREF_EN_12_SEL: U33.8 U48.11
IREF_EN_56: J13.160 U34.6
IREF_EN_56_SEL: U34.8 U48.10
IREF_EN_D: J13.77 U35.6
IREF_EN_D_SEL: U35.8 U48.25
IREF_IBX_12: J13.131 R4.1
IREF_IBX_56: J13.157 R5.1
IREF_IBX_D: J13.79 R6.1
IREF_REXT_12: J13.129 VR3.1 VR3.2(WIPER)
IREF_REXT_56: J13.159 VR4.1 VR4.2(WIPER)
IREF_REXT_D: U2.11 VR5.1 VR5.2(WIPER)
IREF_TEST_12: J13.130 U30.6
IREF_TEST_12_SEL: U30.8 U48.20
IREF_TEST_56: J13.158 U31.6
IREF_TEST_56_SEL: U31.8 U48.19
IREF_TEST_D: J13.81 U32.6
IREF_TEST_D_SEL: U32.8 U48.18
RST: C4.2 J14.11 R7.2 U48.16
SEL1_0: U8.11 U48.40
SEL1_1: U8.10 U48.41
SEL1_2: U8.9 U48.42
SEL2_0: U9.1 U10.1 U48.43
SEL2_1: U9.14 U10.14 U48.44
SEL3: U11.8 U12.8 U13.8 U14.8 U48.33
SEL4_0: U38.1 U48.9
SEL4_1: U38.14 U48.8
SEL5_0: U39.1 U48.7
SEL5_1: U39.14 U48.6
SEL6_0: U42.1 U48.29
SEL6_1: U42.14 U48.30
SEL7_0: U43.1 U48.31
SEL7_1: U43.14 U48.32
SEL8_0: U46.1 U48.36
SEL8_1: U46.14 U48.37
SEL9_0: U47.1 U48.38
SEL9_1: U47.14 U48.39
SEL10: U37.8 U48.5
SEL11: U41.8 U48.34
SEL12: U45.8 U48.35
SEL13: U27.8 U48.28
SEL14: U28.8 U48.27
SEL15: U48.26
SEL15]: U29.8
SEL16_0: U2.1 U48.4
SEL16_1: U2.14 U48.3
SENSOR_1: J1.03 J13.121
SENSOR_2: J13.115 J16.1
SENSOR_5: J13.112 J17.1
SENSOR_D: J13.82 J20.1
SHARED_VB: J11.04 U12.6
SHARED_VD: J11.08 U14.6
SNFET_1_VD: J13.145 U8.13
SNFET_2_VD: U8.14
SNFET_3_VD: J13.142 U8.15
SNFET_4_VD: U8.12
SNFET_5_VB: J13.138 U10.11
SNFET_5_VD: J13.137 U8.1
SNFET_5_VS: J13.136 U9.11
SNFET_SHARED_VB: J13.146 U10.10
SNFET_SHARED_VS: U9.10
SPFET_1_VB: J13.139 U10.4
SPFET_1_VD: J13.135 U8.5
SPFET_1_VS: J13.224 U9.4
SPFET_2_VB: J13.140 U10.5
SPFET_2_VD: J13.134 U8.2
SPFET_2_VS: J13.225 U9.5
T_VRPS_12_INT: R11.2 TP9.TP U36.6 U38.5 U39.5
T_VRPS_56_INT: R12.2 TP10.TP U40.6 U42.5 U43.5
T_VRPS_C_12: J13.120 U39.6
T_VRPS_C_12_EXT: J5.04 U39.4
T_VRPS_C_56: J13.111 U43.6
T_VRPS_C_56_EXT: J6.04 U43.4
T_VRPS_C_D: J13.78 U47.6
T_VRPS_C_D_EXT: J7.04 U47.4
T_VRPS_C_SHARED: J8.01 U39.11 U43.11 U47.11
T_VRPS_D_INT: R14.2 TP11.TP U44.6 U46.5 U47.5
T_VRPS_M_12: J13.118 U38.6
T_VRPS_M_12_EXT: J5.02 U38.4
T_VRPS_M_56: J13.109 U42.6
T_VRPS_M_56_EXT: J6.02 U42.4
T_VRPS_M_D: J13.69 U46.6
T_VRPS_M_D_EXT: J7.02 U46.4
T_VRPS_M_SHARED: J8.03 U38.11 U42.11 U46.11
TCK: J14.7 U48.24
TDI: J14.3 U48.22
TDO: J14.1 U48.21
TEST: J14.8 U48.17(TEST/SBWTCK)
TEST_EN_D: J13.75
TIA_C_OUT_BUF: J12.04 J13.74
TIA_M_OUT_BUF: J12.06 J13.73
TMS: J14.5 U48.23
VB: J10.06 U10.6
VD: J10.02 U8.3
VRPS_12: J13.117 U36.3 U37.6
VRPS_12_EXT: J5.06 U37.7
VRPS_56: J13.163 U40.3 U41.6
VRPS_56_EXT: J6.06 U41.7
VRPS_D: J13.70 U44.3 U45.6
VRPS_D_EXT: J7.06 U45.7
VRPS_SHARED: J9.01 U37.5 U41.5 U45.5
VS: J10.04 U9.6
VSN: J11.06 U13.6
VSP: J11.02 U11.6
XIN: C8.1 U48.13 X1.2
XOUT: C7.1 U48.12 X1.1
N27284: C23.1 U3.6
N27530: R9.1 U4.1
N27546: C26.1 U4.6
N27570: C26.2 U4.5
N27682: C29.1 U5.3
N27710: C29.2 U5.4
N66840: R10.2 U36.2
N67476: R13.2 U40.2
N68112: R15.2 U44.2
N93788: R16.1 R17.2 U6.4
N134590: R18.1 R19.2 U7.4(SET)
N162422: J13.132

Pads without a net: J1 S1 S2; J5 S1 S2; J6 S1 S2; J7 S1 S2; J8 S1 S2; J9 S1 S2; J10 S1 S2; J12 S1 S2; J13 1 3 4 5 6 7 8 10 11 12 13 14 15 16 17 18 19 20 21 22 23 24 26 27 28 29 30 31 32 33 34 35 36 37 38 39 40 41 42 43 44 45 46 47 48 49 50 51 52 53 54 55 56 57 58 59 60 61 62 63 65 68 85 86 87 88 89 90 91 92 93 94 95 96 98 99 100 101 102 103 104 105 106 107 133 141 147 154 155 156 166 167 168 169 170 171 172 173 174 175 176 177 178 179 180 181 182 183 184 185 186 187 188 189 190 191 192 193 194 195 196 197 198 199 200 201 202 203 204 205 206 207 208 209 210 211 212 213 214 215 216 217 219 220 221 222 223 226 A1 A2 A3 A4 A5 A6 A7 A8 A9 A10 A11 A12 A13 A14 A15 A16 A17 A18 A19 A20 A21 A22 A23 A24 A25 A26 A27 A28 A29 A30 A31 A32 A33 A34 A35 A36 A37 A38 A39; J14 2 6 10 12 13 14; U2 7 8 9; U4 8; U8 4; U9 7 8 9; U10 7 8 9; U36 1 5 8; U38 7 8 9 10; U39 7 8 9 10; U40 1 5 8; U42 7 8 9 10; U43 7 8 9 10; U44 1 5 8; U46 7 8 9 10; U47 7 8 9 10; U48 1 2

## Via types
v1: diameter 0.5, hole 0.2, TOP to BOTTOM, 66 vias
v2: diameter 0.5, hole 0.2, TOP to TRACE, 124 vias
v3: diameter 0.5, hole 0.2, TRACE to BOTTOM, 7 vias
v4: diameter 0.5, hole 0.2, TOP to GND, 58 vias
v5: diameter 0.5, hole 0.2, GND to BOTTOM, 13 vias

## Routing (per net, layer and track width the routed paths; a pad name or vN(x,y) marks a point on that pad's centre or on a via; arc(x,y) is an arc through that point)
3.3V: length 11.3
  TOP w0.1: R7.1 v2(135.77,90.84) ; C105.2 v2(134.76,85.91) C104.2
  BOTTOM w0.1: U3.1 131.17,12.56 ; 131.17,12.56 v3(131.72,13.11) ; 131.17,12.56 131.67,12.56 132.77,11.46 ; 132.44,11.29 131.17,10.03 U3.3 ; 132.44,11.29 U3.2 ; 132.44,11.29 132.61,11.29 132.77,11.46 ; C22.1 132.77,11.46
5V_UNREGULATED: length 51.5
  BOTTOM w0.1: 116.79,13.57 116.79,15.03 116.79,15.03 116.79,18.88 114.61,21.06 C27.1 112.79,21.71 U5.6 U5.1 ; 116.79,13.57 J15.1A J15.1B ; 116.79,13.57 118.17,14.95 121.49,14.95 122.8,13.65 C21.1 123.64,12.66 123.74,12.56 U3.8 U3.7 125.73,11.29 126.26,10.77 126.26,9.28 125.73,8.75 U3.5 ; C98.1 99.37,38.95 100.15,38.17 U6.1 99.54,37.61 99,37.07 99,36.25 99.54,35.71 U6.3 ; C24.1 130.4,22.09 129.15,23.34 U4.3 127.3,23.34 126.65,23.98 U4.7
+1.65V: length 26.9
  TOP w0.1: U24.5 v2(66.97,49.16) ; U29.5 v2(79.56,41.63) ; U19.5 v2(54.37,56.69) ; U15.5 v2(40.78,56.69) ; U27.5 v2(79.56,56.69) ; U30.5 v2(92.16,56.69) ; U28.5 v2(79.56,49.16) ; U26.5 v2(66.97,33.69) ; U33.5 v2(80.04,33.69) ; U23.5 v2(66.97,56.69) ; U20.5 v2(54.37,49.16) ; U17.5 v2(40.78,41.63) ; U18.5 v2(40.78,33.69) ; U32.5 v2(92.16,41.63) ; U25.5 v2(66.97,41.63) ; U34.5 v2(92.16,33.69) ; U31.5 v2(92.16,49.16) ; U16.5 v2(40.78,49.16) ; U2.10 v2(41.25,22.24) ; U35.5 v2(92.04,66.69) ; U22.5 v2(54.37,33.69) ; U21.5 v2(54.37,41.63)
  BOTTOM w0.1: R16.2 v3(96.57,37.61) U6.5 97.85,38.17 97,39.02 C99.1
+5V: length 185.2
  TOP w0.1: 88.67,42.94 U32.1 ; U32.1 C58.1 ; U32.1 v2(89.65,43.59) ; U18.1 v2(38.27,35.63) ; U18.1 C52.1 ; U18.1 U18.2 ; U25.1 v2(64.46,43.59) ; U25.1 63.48,42.94 ; U25.1 C34.1 ; U28.2 76.07,51.12 ; 76.07,51.12 C17.1 ; 76.07,51.12 v2(77.05,51.12) ; U34.1 v2(89.65,35.63) ; U34.1 U34.2 ; U34.1 C62.1 ; U38.2 98.73,56.53 99.38,57.19 U38.12 99.38,60.37 99.56,60.54 C69.2 v2(100.51,61.53) ; U44.7 v2(38.1,73.29) ; U35.2 U35.1 ; U35.1 v2(89.53,68.63) ; U35.1 C64.1 ; 88.67,58 U30.1 ; U30.1 v2(89.65,58.65) ; U30.1 C54.1 ; U36.7 v2(104.37,42.76) ; C50.1 U17.1 ; U17.1 v2(38.27,43.59) ; U17.1 37.28,42.94 ; C75.1 U41.1 ; U41.1 v2(14,89.98) ; U41.1 U41.2 ; 88.67,51.12 v2(89.65,51.12) ; 88.67,51.12 C56.1 ; 88.67,51.12 U31.2 ; U42.2 29.88,101.94 30.53,101.28 U42.12 33.71,101.28 33.88,101.1 C72.2 v2(34.87,100.15) ; U26.1 v2(64.46,35.63) ; U26.1 U26.2 ; U26.1 C36.1 ; U33.2 U33.1 ; U33.1 C60.1 ; U33.1 v2(77.53,35.63) ; U9.2 12.73,27 13.38,26.35 U9.12 ; U8.16 v2(73.95,83.49) C88.2 ; U14.1 v2(57.18,87.44) ; U14.1 C96.1 ; U14.1 U14.2 ; U10.2 70.17,71.89 70.81,71.24 U10.12 74,71.24 74.18,71.06 C86.2 ; C90.1 45.54,94.63 ; 45.54,94.63 v2(46.53,94.63) ; 45.54,94.63 45.54,93.98 ; C15.1 U27.1 ; U27.1 v2(77.05,58.65) ; U27.1 76.07,58 ; U40.7 v2(16.1,96.29) ; U12.2 U12.1 ; U12.1 v2(57.12,94.63) ; U12.1 C92.1 ; C94.1 U13.1 ; U13.1 U13.2 ; U13.1 v2(46.38,87.44) ; C44.1 U22.1 ; U22.1 U22.2 ; U22.1 v2(51.86,35.63) ; C32.1 63.48,51.12 ; 63.48,51.12 U24.2 ; 63.48,51.12 v2(64.46,51.12) ; U19.1 v2(51.86,58.65) ; U19.1 C38.1 ; U19.1 50.88,58 ; U21.1 v2(51.86,43.59) ; U21.1 50.88,42.94 ; U21.1 C42.1 ; U45.1 v2(36,66.98) ; U45.1 C81.1 ; U45.1 U45.2 ; U43.2 29.88,94.31 30.53,93.66 U43.12 33.71,93.66 33.88,93.48 C74.2 v2(34.87,92.53) ; U16.2 37.28,51.12 ; 37.28,51.12 v2(38.27,51.12) ; 37.28,51.12 C48.1 ; C84.2 v2(17.72,25.22) ; U37.1 v2(110.68,40.66) ; U37.1 C66.1 ; U37.1 U37.2 ; U15.1 v2(38.27,58.65) ; U15.1 C46.1 ; U15.1 37.28,58 ; 63.48,58 U23.1 ; U23.1 C30.1 ; U23.1 v2(64.46,58.65) ; C100.2 v2(38.04,22.08) ; v2(56.87,69.53) C80.2 55.88,70.48 55.71,70.66 U47.12 52.53,70.66 51.88,71.31 U47.2 ; U46.2 51.88,78.94 52.53,78.28 U46.12 55.71,78.28 55.88,78.1 C78.2 v2(56.87,77.15) ; C40.1 50.88,51.12 ; 50.88,51.12 U20.2 ; 50.88,51.12 v2(51.86,51.12) ; U39.2 106.35,56.53 107,57.19 U39.12 107,60.37 107.18,60.54 C70.2 v2(108.13,61.53) ; 76.07,42.94 U29.1 ; U29.1 v2(77.05,43.59) ; U29.1 C19.1
  BOTTOM w0.1: 128.87,27.16 R9.2 v3(130.4,27.16) C25.1 129.73,23.98 U4.2
-1.65V: length 58.6
  TOP w0.1: 39.79,58 v2(40.78,58) ; U22.7 v2(54.37,34.98) ; v2(71.06,17.82) 70.43,17.82 69.47,16.86 R5.2 ; v2(71.06,17.82) R6.2 ; v2(71.06,17.82) TP2.TP ; v2(71.06,17.82) 71.7,17.82 72.66,16.86 R4.2 ; U28.7 v2(79.56,50.47) ; U20.7 v2(54.37,50.47) ; U18.7 v2(40.78,34.98) ; 78.58,42.94 v2(79.56,42.94) ; 91.18,58 v2(92.16,58) ; U34.7 v2(92.16,34.98) ; 65.99,42.94 v2(66.97,42.94) ; U35.7 v2(92.04,67.98) ; U31.7 v2(92.16,50.47) ; 91.18,42.94 v2(92.16,42.94) ; U33.7 v2(80.04,34.98) ; 53.39,42.94 v2(54.37,42.94) ; 65.99,58 v2(66.97,58) ; 78.58,58 v2(79.56,58) ; U26.7 v2(66.97,34.98) ; 39.79,42.94 v2(40.78,42.94) ; U16.7 v2(40.78,50.47) ; U24.7 v2(66.97,50.47) ; 53.39,58 v2(54.37,58)
  BOTTOM w0.1: VR4.3 v3(22.78,13.4) ; v3(22.78,13.4) 23.67,13.4 26.62,16.34 29.64,16.34 30.78,15.2 VR5.3 ; v3(22.78,13.4) 17.5,13.4 16.04,14.85 VR3.3 ; R18.2 v3(106.77,37.61) U7.5 C108.1
-5V: length 119.4
  TOP w0.1: C31.2 62.87,55.97 62.98,56.08 v2(63.48,56.08) U23.4 ; v1(6.38,26.17) C85.1 8.56,26.17 8.75,26.35 U9.3 ; U24.4 v2(63.48,48.55) 62.98,48.55 62.87,48.44 C33.2 ; 45.54,92.69 v2(45.54,92.07) 45.04,92.07 44.94,91.96 C91.2 ; U12.4 v2(56.14,92.07) 55.64,92.07 55.53,91.96 C93.2 ; U25.4 v2(63.48,41.02) 62.98,41.02 62.87,40.91 C35.2 ; C16.2 75.46,55.97 75.57,56.08 v2(76.07,56.08) U27.4 ; v2(113.25,39.67) U37.4 112.63,39.31 113.36,38.59 C67.2 ; U30.4 v2(88.67,56.08) 88.17,56.08 88.06,55.97 C55.2 ; C68.1 99.56,52.37 99.38,52.55 U38.3 v2(99.38,55.08) ; U18.4 v2(37.28,33.07) 36.78,33.07 36.68,32.96 C53.2 ; v1(63.81,71.06) C87.1 66,71.06 66.18,71.24 U10.3 ; C76.2 11.93,87.31 12.65,88.03 U41.4 v2(13.01,87.41) ; C71.1 107.18,52.37 107,52.55 U39.3 v2(107,55.08) ; U32.4 v2(88.67,41.02) 88.17,41.02 88.06,40.91 C59.2 ; C37.2 62.87,32.96 62.98,33.07 v2(63.48,33.07) U26.4 ; C39.2 50.27,55.97 50.38,56.08 v2(50.88,56.08) U19.4 ; U17.4 v2(37.28,41.02) 36.78,41.02 36.68,40.91 C51.2 ; U33.4 v2(76.55,33.07) 76.05,33.07 75.94,32.96 C61.2 ; v2(35.01,64.41) U45.4 34.65,65.03 33.93,64.31 C82.2 ; C18.2 75.46,48.44 75.57,48.55 v2(76.07,48.55) U28.4 ; C79.1 47.71,78.1 47.89,78.28 U46.3 v2(50.75,78.28) ; U22.4 v2(50.88,33.07) 50.38,33.07 50.27,32.96 C45.2 ; C65.2 87.94,65.96 88.05,66.07 v2(88.55,66.07) U35.4 ; v2(49.92,70.66) U47.3 47.89,70.66 47.71,70.48 C83.1 ; C20.2 75.46,40.91 75.57,41.02 v2(76.07,41.02) U29.4 ; C63.2 88.06,32.96 88.17,33.07 v2(88.67,33.07) U34.4 ; U44.4 v2(34.54,70.1) ; U2.3 47.03,20.94 47.21,21.12 C101.1 v1(49.39,21.12) ; U14.4 v2(56.19,84.87) 55.69,84.87 55.59,84.76 C97.2 ; U13.4 v2(45.4,84.87) 44.9,84.87 44.79,84.76 C95.2 ; C43.2 50.27,40.91 50.38,41.02 v2(50.88,41.02) U21.4 ; v2(69.13,79.03) U8.7 U8.6 67.1,79.69 66.8,79.98 65.35,79.98 ; v2(27.92,101.28) U42.3 25.89,101.28 25.71,101.1 C73.1 ; C49.2 36.68,48.44 36.78,48.55 v2(37.28,48.55) U16.4 ; v2(27.92,93.66) U43.3 25.89,93.66 25.71,93.48 C77.1 ; U20.4 v2(50.88,48.55) 50.38,48.55 50.27,48.44 C41.2 ; U31.4 v2(88.67,48.55) 88.17,48.55 88.06,48.44 C57.2 ; U36.4 v2(107.56,39.2) ; C47.2 36.68,55.97 36.78,56.08 v2(37.28,56.08) U15.4 ; U40.4 v2(12.54,93.1)
  BOTTOM w0.1: U7.3 v3(109.5,35.71) ; U7.3 U7.2 ; U7.3 111.1,35.71 111.18,35.63 112.19,35.63 112.48,35.92 112.48,35.99 C109.1 ; U5.2 107.94,22.66 107.75,22.86 C28.1 v3(106.57,21.9)
GND: length 262.1
  TOP w0.1: v4(97,61.53) C69.1 97.95,61.31 98.73,60.53 U38.13 ; C95.1 v4(41.85,86.14) ; v4(41.85,86.14) U13.3 ; v4(41.85,86.14) C94.2 ; R14.1 v4(42,75.57) ; U48.14 v4(133.16,88.41) C104.1 C105.1 ; U18.3 v4(33.74,34.34) ; v4(33.74,34.34) C52.2 ; v4(33.74,34.34) C53.1 ; R13.1 v4(10,92.75) ; U35.3 v4(85,67.34) ; v4(85,67.34) C64.2 ; v4(85,67.34) C65.1 ; U26.3 v4(59.93,34.34) ; v4(59.93,34.34) C36.2 ; v4(59.93,34.34) C37.1 ; U22.3 v4(47.34,34.34) ; v4(47.34,34.34) 47.34,35.63 ; v4(47.34,34.34) 47.34,32.96 ; U8.8 v4(66.97,78.38) C89.2 ; C101.2 v4(48.21,18.56) ; R10.1 v4(107.91,36.66) ; U42.13 33.88,101.94 34.65,102.7 34.87,102.7 v4(34.87,103.66) ; C92.2 v4(52.59,93.34) ; v4(52.59,93.34) C93.1 ; v4(52.59,93.34) U12.3 ; C54.2 v4(85.12,57.34) ; v4(85.12,57.34) C55.1 ; v4(85.12,57.34) U30.3 ; C87.2 v4(65,73.62) ; C76.1 v4(9.47,88.68) ; v4(9.47,88.68) U41.3 ; v4(9.47,88.68) C75.2 ; U10.13 74.17,71.89 74.94,72.66 C86.1 v4(75.16,73.62) ; U45.3 v4(31.47,65.68) ; v4(31.47,65.68) C81.2 ; v4(31.47,65.68) C82.1 ; C77.2 v4(24.71,96.04) ; C49.1 v4(33.74,49.81) ; v4(33.74,49.81) C48.2 ; v4(33.74,49.81) U16.3 ; U23.3 v4(59.93,57.34) ; v4(59.93,57.34) C30.2 ; v4(59.93,57.34) C31.1 ; C8.2 v4(123.31,75.94) ; C34.2 v4(59.93,42.28) ; v4(59.93,42.28) C35.1 ; v4(59.93,42.28) U25.3 ; C50.2 v4(33.74,42.28) ; v4(33.74,42.28) C51.1 ; v4(33.74,42.28) U17.3 ; C32.2 v4(59.93,49.81) ; v4(59.93,49.81) U24.3 ; v4(59.93,49.81) C33.1 ; C16.1 v4(72.52,57.34) ; v4(72.52,57.34) U27.3 ; v4(72.52,57.34) C15.2 ; v4(33.74,57.34) C46.2 33.74,58.67 ; v4(33.74,57.34) C47.1 ; v4(33.74,57.34) U15.3 ; R12.1 v4(20,98.57) ; v4(34.87,96.04) C74.1 34.65,95.09 33.88,94.31 U43.13 ; C90.2 v4(42,93.34) ; v4(42,93.34) 45.54,93.34 ; v4(42,93.34) C91.1 ; U29.3 v4(72.52,42.28) ; v4(72.52,42.28) C20.1 ; v4(72.52,42.28) C19.2 ; U31.3 v4(85.12,49.81) ; v4(85.12,49.81) C56.2 ; v4(85.12,49.81) C57.1 ; U39.13 106.35,60.53 105.57,61.31 C70.1 v4(104.62,61.53) ; C58.2 v4(85.12,42.28) ; v4(85.12,42.28) U32.3 ; v4(85.12,42.28) C59.1 ; C88.1 v4(71.39,84.92) ; C67.1 v4(111.98,36.13) ; v4(111.98,36.13) C66.2 ; v4(111.98,36.13) U37.3 ; 24.71,102.7 v4(24.71,103.66) ; C63.1 v4(85.12,34.34) ; v4(85.12,34.34) C62.2 ; v4(85.12,34.34) U34.3 ; 47.34,43.59 v4(47.34,42.28) ; v4(47.34,42.28) U21.3 ; v4(47.34,42.28) 47.34,40.91 ; 47.34,58.65 v4(47.34,57.34) ; v4(47.34,57.34) U19.3 ; v4(47.34,57.34) 47.34,55.97 ; C17.2 v4(72.52,49.81) ; v4(72.52,49.81) C18.1 ; v4(72.52,49.81) U28.3 ; C100.1 v4(38.04,18.56) ; R11.1 v4(102.09,46.66) ; C84.1 v4(17.72,28.73) ; C71.2 v4(104.62,51.37) ; 47.34,51.12 v4(47.34,49.81) ; v4(47.34,49.81) 47.34,48.44 ; v4(47.34,49.81) U20.3 ; C83.2 v4(46.71,73.04) ; U33.3 v4(73,34.34) ; v4(73,34.34) C60.2 ; v4(73,34.34) C61.1 ; U46.13 55.88,78.94 56.65,79.7 56.87,79.7 v4(56.87,80.66) ; R15.1 v4(32,69.75) ; 46.71,79.7 v4(46.71,80.66) ; v4(56.87,73.04) C80.1 56.65,72.09 55.88,71.31 U47.13 ; U14.3 v4(52.65,86.14) ; v4(52.65,86.14) C96.2 ; v4(52.65,86.14) C97.1 ; C7.2 v4(130.94,75.94) ; C4.1 v4(135.62,93.02) ; C68.2 v4(97,51.37) ; C85.2 v4(7.56,28.73)
  BOTTOM w0.1: C109.2 v5(111.23,37.61) U7.1 ; U5.5 v5(112.25,22.66) ; R19.1 v5(110.91,32.66) ; U6.2 v5(101.43,36.66) ; C21.2 v5(121.2,10.63) C23.2 ; C24.2 v5(132,22.69) C25.2 ; J15.3 J15.2 v5(107.04,7.28) ; C108.2 v5(110.19,39.75) ; R17.1 v5(100.91,33.66) ; C99.2 v5(98.19,41.46) C98.2 ; U4.4 v5(127.17,22.69) ; C28.2 v5(106.57,25.42) ; C27.2 112.38,22.66 ; C22.2 v5(133,8.75) U3.4 130.27,8.75 129.69,9.34 129.32,9.34 U3.9
CH_EN_1_SEL: length 0.6
  TOP w0.1: U23.8 v1(65.99,59.26)
CH_EN_2_SEL: length 0.6
  TOP w0.1: 65.99,51.12 v1(65.99,51.73)
CH_EN_5_SEL: length 0.6
  TOP w0.1: U25.8 v1(65.99,44.2)
CH_EN_D_SEL: length 0.6
  TOP w0.1: U26.8 v1(65.99,36.25)
COND_EN_1_SEL: length 0.6
  TOP w0.1: U19.8 v1(53.39,59.26)
COND_EN_2_SEL: length 0.6
  TOP w0.1: 53.39,51.12 v1(53.39,51.73)
COND_EN_5_SEL: length 0.6
  TOP w0.1: U21.8 v1(53.39,44.2)
COND_EN_D_SEL: length 0.6
  TOP w0.1: U22.8 v1(53.39,36.25)
HP_BYPASS_EN_1_SEL: length 0.6
  TOP w0.1: U15.8 v1(39.79,59.26)
HP_BYPASS_EN_2_SEL: length 0.6
  TOP w0.1: 39.79,51.12 v1(39.79,51.73)
HP_BYPASS_EN_5_SEL: length 12.2
  TOP w0.1: U17.8 v1(39.79,44.2)
  BOTTOM w0.1: v1(39.79,44.2) 39.29,43.7 39.29,36.04 39.31,36.02 v1(39.31,32.85)
HP_BYPASS_EN_D_SEL: length 0.6
  TOP w0.1: U18.8 v1(39.79,36.25)
IREF_EN_12_SEL: length 0.6
  TOP w0.1: U33.8 v1(79.06,36.25)
IREF_EN_56_SEL: length 0.6
  TOP w0.1: U34.8 v1(91.18,36.25)
IREF_EN_D_SEL: length 0.6
  TOP w0.1: U35.8 v1(91.06,69.25)
IREF_TEST_12_SEL: length 0.6
  TOP w0.1: U30.8 v1(91.18,59.26)
IREF_TEST_56_SEL: length 0.6
  TOP w0.1: 91.18,51.12 v1(91.18,51.73)
IREF_TEST_D_SEL: length 0.6
  TOP w0.1: U32.8 v1(91.18,44.2)
RST: length 5.1
  TOP w0.1: U48.16 131.68,89.41 132.87,90.59 R7.2 132.87,91.84 133.06,92.03 C4.2
SEL1_0: length 1.1
  TOP w0.1: U8.11 v1(75.03,79.69)
SEL1_1: length 1.1
  TOP w0.1: U8.10 v1(72.87,79.03)
SEL1_2: length 1.1
  TOP w0.1: U8.9 v1(75.03,78.38)
SEL2_0: length 1.2
  TOP w0.1: U10.1 v1(67.13,73.14) ; 9.69,27.66 v1(9.69,28.26)
SEL2_1: length 1.2
  TOP w0.1: 15.59,27.66 v1(15.59,28.26) ; U10.14 v1(73.03,73.14)
SEL4_0: length 0.6
  TOP w0.1: U38.1 v1(97.47,53.5)
SEL4_1: length 0.6
  TOP w0.1: U38.14 v1(97.47,59.4)
SEL5_0: length 0.6
  TOP w0.1: U39.1 v1(105.09,53.5)
SEL5_1: length 0.6
  TOP w0.1: U39.14 v1(105.09,59.4)
SEL13: length 0.6
  TOP w0.1: U27.8 v1(78.58,59.26)
SEL14: length 0.6
  TOP w0.1: 78.58,51.12 v1(78.58,51.73)
SEL15]: length 0.6
  TOP w0.1: U29.8 v1(78.58,44.2)
SEL16_0: length 0.6
  TOP w0.1: U2.1 v1(46.07,19.04)
SEL16_1: length 0.6
  TOP w0.1: U2.14 v1(40.18,19.04)
SHARED_VB: length 11.9
  TOP w0.1: U12.6 v1(57.67,93.34)
  BOTTOM w0.1: J11.04 53.25,97.33 57.25,93.34 v1(57.67,93.34)
SHARED_VD: length 17.3
  TOP w0.1: U14.6 v1(57.72,86.14)
  BOTTOM w0.1: J11.08 58.33,86.75 v1(57.72,86.14)
T_VRPS_12_INT: length 27.1
  TOP w0.1: 105,46.91 108.3,50.2 108.3,53.5 ; 105,46.91 R11.2 105.63,46.03 105.63,44.83 ; 105,46.91 100.68,51.23 100.68,53.5 ; 105.63,44.83 109.54,48.73 TP9.TP ; 105.63,44.83 U36.6
T_VRPS_56_INT: length 20.2
  TOP w0.1: 18.17,95.03 v1(18.77,94.43) ; 18.17,95.03 18.8,95.66 R12.2 20.32,95.66 ; 18.17,95.03 U40.6 ; 20.32,95.66 23.62,92.37 U43.5 ; 20.32,95.66 21.12,95.66 24.84,99.39 25.75,99.39 26.17,99.81 26.66,99.81 U42.5
T_VRPS_C_12_EXT: length 55
  TOP w0.1: U39.4 v1(107.64,54.58)
  BOTTOM w0.1: v1(107.64,54.58) 109.91,56.84 133.86,56.84 135.87,54.83 135.87,41.99 133.72,39.84 130.06,39.84 J5.04
T_VRPS_C_56_EXT: length 24
  TOP w0.1: U43.4 28.05,93.01 v1(28.52,92.54)
  BOTTOM w0.1: v1(28.52,92.54) 25.98,92.54 15.03,81.6 J6.04
T_VRPS_C_D: length 1.1
  TOP w0.1: 48.84,68.72 v1(47.76,68.72)
T_VRPS_C_D_EXT: length 42.1
  TOP w0.1: v1(50.12,69.99) 50.11,69.99 50.09,70.01 U47.4
  BOTTOM w0.1: v1(50.12,69.99) 43.46,63.34 16.46,63.34 15.03,64.75 J7.04
T_VRPS_C_SHARED: length 152.8
  TOP w0.1: v1(108.13,60.79) 108.04,60.79 107.64,60.4 U39.11 ; U47.11 v1(53.66,70.01) ; v1(34.17,92.53) 34.15,92.54 33.71,92.54 33.41,92.84 33.39,92.84 33.22,93.01 U43.11
  BOTTOM w0.1: v1(53.66,70.01) 52.65,71.03 52.65,77.09 37.22,92.53 v1(34.17,92.53) 33.6,93.09 33.6,100.8 36.74,103.94 81.89,103.94 89.64,96.19 J8.01 90.91,96.35 93.29,96.35 108.13,81.51 v1(108.13,60.79)
T_VRPS_D_INT: length 25.2
  TOP w0.1: 42.25,72.66 46.57,76.98 U46.5 ; 42.25,72.66 45.54,69.37 U47.5 ; 42.25,72.66 R14.2 41.37,72.03 40.17,72.03 ; TP11.TP 42.49,69.7 40.17,72.03 ; 40.17,72.03 U44.6
T_VRPS_M_12_EXT: length 61.7
  TOP w0.1: U38.4 v1(100.02,54.58)
  BOTTOM w0.1: v1(100.02,54.58) 102.59,57.14 133.99,57.14 136.17,54.96 136.17,41.54 133.83,39.2 131.22,39.2 129.5,37.49 J5.02
T_VRPS_M_56_EXT: length 29.6
  TOP w0.1: U42.4 25.86,100.63 v1(25.37,100.14)
  BOTTOM w0.1: J6.02 12.5,79.69 22.17,89.37 22.17,96.95 v1(25.37,100.14)
T_VRPS_M_D_EXT: length 55.9
  TOP w0.1: U46.4 v1(49.92,77.63)
  BOTTOM w0.1: v1(49.92,77.63) 52.01,75.54 52.01,69.05 45.66,62.7 14.55,62.7 12.5,64.75 J7.02
T_VRPS_M_SHARED: length 140.1
  TOP w0.1: U38.11 100.02,59.88 100.2,60.05 100.2,60.07 100.48,60.35 100.5,60.35 v1(100.93,60.78) ; U42.11 33.22,100.63 33.39,100.46 33.41,100.46 33.71,100.16 34.15,100.16 v1(34.17,100.15) ; U46.11 v1(53.66,77.63)
  BOTTOM w0.1: v1(53.66,77.63) 52.96,77.63 34.17,96.42 v1(34.17,100.15) 37.67,103.64 81.56,103.64 85.67,99.53 85.67,95.08 86.94,93.81 90.91,93.81 J8.03 100.93,86.34 v1(100.93,60.78)
VB: length 1.1
  TOP w0.1: U10.6 v1(68.21,69.29)
VD: length 1.1
  TOP w0.1: U8.3 v1(66.97,81.63)
VRPS_12: length 8.8
  TOP w0.1: U37.6 111.98,41.33 111.86,41.21 106.41,41.21 105.63,40.43 U36.3
VRPS_12_EXT: length 59.2
  TOP w0.1: U37.7 111.33,42.75 v1(110.37,43.72)
  BOTTOM w0.1: v1(110.37,43.72) 123.19,56.54 133.74,56.54 135.57,54.71 135.57,42.12 133.93,40.47 128.16,40.47 J5.06
VRPS_56: length 8.5
  TOP w0.1: U40.3 13.24,95.03 14.55,93.72 14.55,88.8 14.67,88.68 U41.6
VRPS_56_EXT: length 24.8
  TOP w0.1: U41.7 v1(16.51,89.33)
  BOTTOM w0.1: J6.06 16.03,75.97 10.68,75.97 10.1,76.54 10.1,81.75 16.51,88.15 v1(16.51,89.33)
VRPS_D: length 8.8
  TOP w0.1: U45.6 36.67,65.68 36.55,65.8 36.55,71.25 35.77,72.03 U44.3
VRPS_D_EXT: length 25.3
  TOP w0.1: U45.7 v1(38.51,66.33)
  BOTTOM w0.1: v1(38.51,66.33) 38.15,65.98 38.15,65.93 36.19,63.97 19,63.97 17.57,65.39 J7.06
VRPS_SHARED: length 301.1
  TOP w0.1: U41.5 v1(14.54,88.03) ; U45.5 v1(36.54,65.03) ; U37.5 v1(112.63,41.2)
  BOTTOM w0.1: v1(112.63,41.2) 117.42,36.41 117.42,34.76 119.96,32.22 119.96,31.69 120.06,31.59 135.83,31.59 137.42,33.17 137.42,57.94 104.08,91.28 104.08,103.34 103.5,103.93 91.38,103.93 J9.01 87.59,104.24 14.18,104.24 8.2,98.26 8.2,92.54 8.84,91.91 13.28,91.91 13.91,91.28 13.91,88.66 v1(14.54,88.03) 14.54,88.53 14.55,88.54 14.55,93.81 24.07,103.34 24.71,103.34 29.16,98.9 29.16,92.47 28.73,92.04 28.31,92.04 28.2,92.16 26.23,92.16 25.42,91.35 25.42,81.04 36.54,69.92 v1(36.54,65.03)
VS: length 163
  TOP w0.1: U9.6 v1(8.62,24.41)
  BOTTOM w0.1: v1(8.62,24.41) 8.62,28.19 9.4,28.97 9.4,29.12 5.03,33.49 5.03,37.94 5.66,38.57 23.44,38.57 27.25,42.38 27.25,43.01 52.01,67.78 54.56,67.78 54.66,67.88 54.66,77.84 54.56,77.94 54.42,77.94 46.43,85.93 46.43,86.07 36.14,96.35 34.97,96.35 34.87,96.45 34.87,100.16 38.04,103.34 60.78,103.34 61.93,102.19 66.79,102.19 67.63,103.03 68.33,103.03 69.18,102.19 69.52,102.19 70.26,102.93 73.64,102.93 J10.04
VSN: length 28
  TOP w0.1: U13.6 v1(46.93,86.14)
  BOTTOM w0.1: J11.06 54.95,103.03 48.93,103.03 48.21,102.3 48.21,98.9 44.4,95.09 44.4,88.67 v1(46.93,86.14)
VSP: length 11.3
  TOP w0.1: U11.6 v1(47.07,93.34)
  BOTTOM w0.1: J11.02 50.71,98.86 47.07,95.22 v1(47.07,93.34)
XIN: length 14.3
  TOP w0.1: U48.13 129.85,87.91 125.88,83.94 X1.2 125.12,78.97 124.65,78.5 C8.1
XOUT: length 12.8
  TOP w0.1: C7.1 129.6,78.5 129.12,78.97 X1.1 128.38,85.94 129.85,87.41 U48.12
N27284: length 3.2
  BOTTOM w0.1: U3.6 123.94,10.03 122.8,8.88 C23.1
N27530: length 3.3
  BOTTOM w0.1: R9.1 127,25.4 127.76,24.63 U4.1
N27546: length 2.7
  BOTTOM w0.1: U4.6 122.85,23.34 122.37,23.81 C26.1
N27570: length 2.7
  BOTTOM w0.1: U4.5 122.69,22.69 122.21,22.21 C26.2
N27682: length 2.2
  BOTTOM w0.1: C29.1 109.2,24.52 108.81,24.13 U5.3
N27710: length 2.2
  BOTTOM w0.1: U5.4 111.19,24.13 110.8,24.52 C29.2
N67476: length 2.8
  TOP w0.1: U40.2 10.63,96.29 R13.2
N93788: length 4.7
  BOTTOM w0.1: R17.2 98,34.62 97.85,34.77 U6.4 96.7,35.71 96.6,35.61 R16.1
N134590: length 5.4
  BOTTOM w0.1: R18.1 106.8,35.61 106.9,35.71 U7.4 107.63,33.99 108,33.62 R19.2
